# Altium PCB LNA_Testboard.PcbDoc
Units mm, origin at the board's own origin, x right, y up, seen from the top; angles counter-clockwise.
Board outline 152.4 x 101.6 mm, 2 copper layers (Top Layer, Bottom Layer); 6 components, 3 nets, 15 pads, 4 vias.
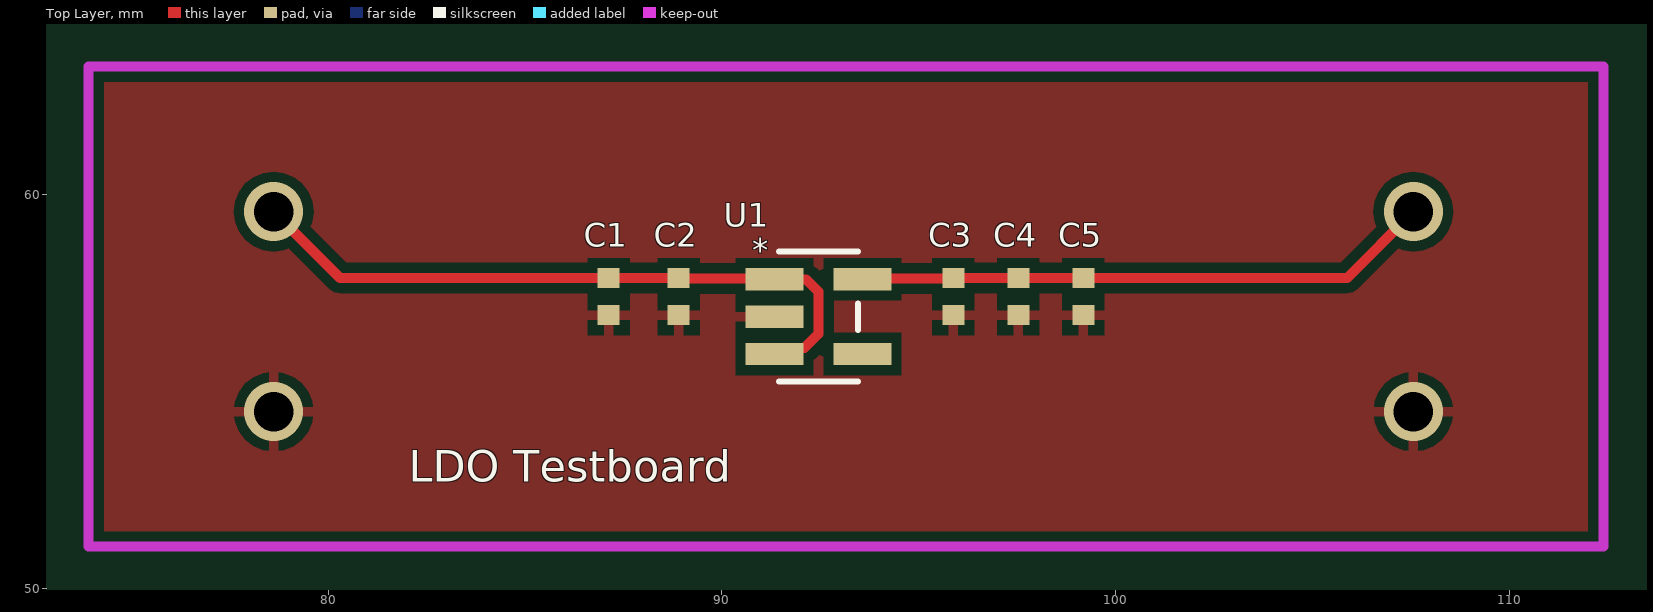
[diagram p0: Top Layer view]
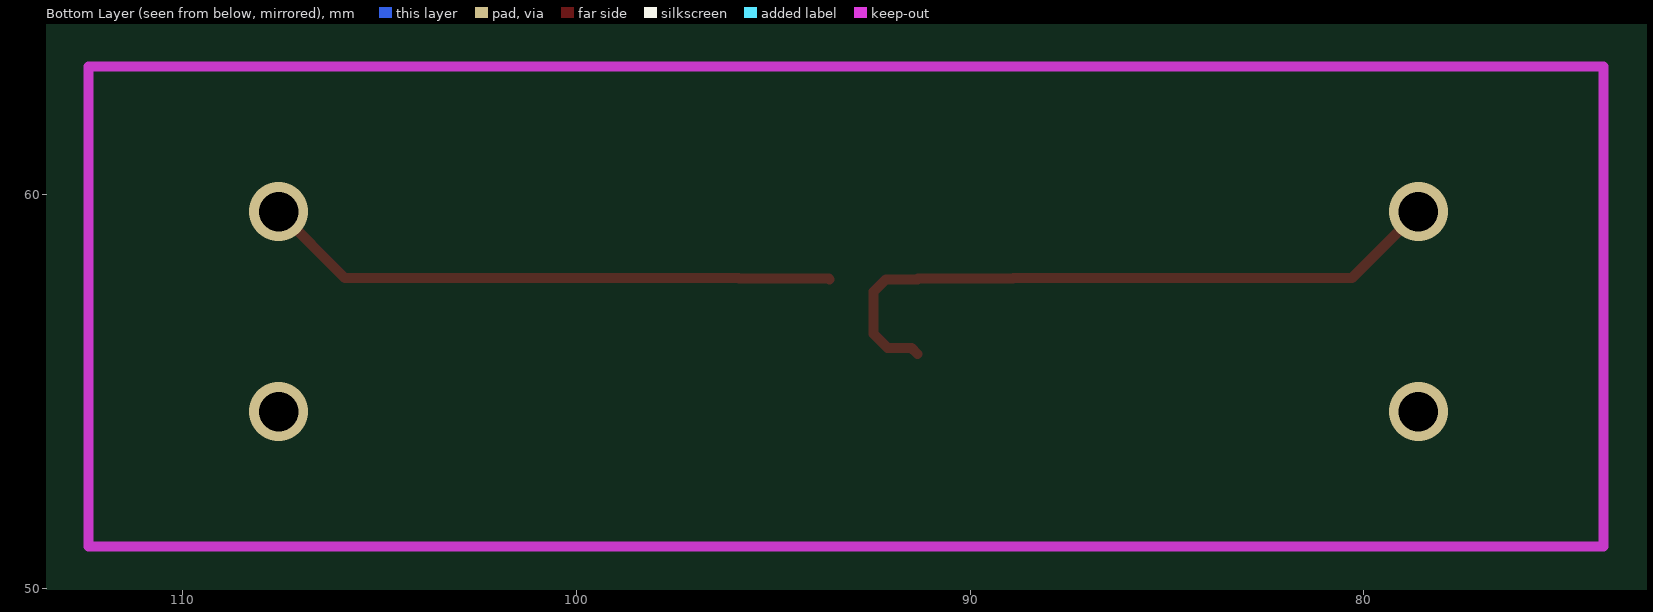
[diagram p1: Bottom Layer view, seen from below]

## Layer stack, top to bottom
Top Solder: solder mask 0.0102, Solder Resist, Dk 3.5
Top Layer: signal copper 0.0356
Dielectric 1: dielectric 0.32, FR-4, Dk 4.8
Bottom Layer: signal copper 0.0356
Bottom Solder: solder mask 0.0102, Solder Resist, Dk 3.5

## Board outline
25.4,25.4 177.8,25.4 177.8,127 25.4,127

## Design rules (kind name [scope] priority, off if disabled: settings)
Clearance [All] p1: gap=0.254 ignorepadtopadclearanceinfootprint=FALSE except(0: Arc-Hole Track-Hole SMDPad-Hole THPad-Hole Via-Hole Fill-Hole Poly-Hole Region-Hole Text-Hole)
PolygonConnect [All] p1: connectstyle=Relief reliefconductorwidth=0.254 reliefentries=4 polygonreliefangle="90 Angle" airgapwidth=0.254
RoomDefinition LNA_Testboard [InComponentClass('LNA_Testboard')] p1: confinementstyle=ConfineIn formatcopy=TRUE lockcomponents=FALSE outline 73.914,63.246 112.395,63.246 112.395,51.054 73.914,51.054
RoutingVias [All] p1: holewidth=0.711 width=1.27 viastyle="Through Hole" minholewidth=0.711 minwidth=1.27 maxholewidth=0.711 maxwidth=1.27
SolderMaskExpansion [All] p1: expansion=0.102
Width [All] p1: maxlimit=0.254 minlimit=0.254 preferedwidth=0.254
30 further rules are at their usual default settings.

## Components (designator, comment, footprint, x,y, rotation, side; value= is the part's Value field where it differs from the comment)
C1 "" YAG_CC0402 87.122,57.404 r270 top value=Value
C2 "" YAG_CC0402 88.9,57.404 r270 top value=Value
C3 "" YAG_CC0402 95.885,57.404 r270 top value=Value
C4 "" YAG_CC0402 97.536,57.404 r270 top value=Value
C5 "" YAG_CC0402 99.187,57.404 r270 top value=Value
U1 "" DBV5 92.456,56.896 r0 top value=Value

## Footprints (in the part's own frame and the unit in brackets; to place one, negate y for a bottom-side part, rotate by r counter-clockwise, add the part's x,y. Pads: shape width x height; smd on the part's side, far side on the other; paste and mask are expansions set on the pad)
DBV5 [mil]
  rect 57.56x22.36 smd paste+0 mask+0: 1(-44,37.4) 2(-44,0) 3(-44,-37.4) 4(44,-37.4) 5(44,37.4)
  silkscreen extent -40,-65 40,65, body extent 0,0 10,10, height 10
YAG_CC0402 [mil]
  rect 20x22 smd paste+0 mask+0: 1(-18.5,0) 2(18.5,0)
  body extent 0,0 10,10, height 10

## Part data
C1 C2 C3 C4 C5: library part C0201C270J3GACTU, "No Description Available", Built_By=EMA_UL_Team, Copyright="Copyright (C) 2018 Accelerated Designs. All rights reserved", Manufacturer_Part_Number=C0201C270J3GACTU, RefDes=RefDes, Type=DEV, Vendor=Kemet
U1: library part LP5907MFX-3.3/NO, "No Description Available", Manufacturer_Part_Number=LP5907MFX-3.3/NOPB, Built_By=EMA_UL_Team, Copyright="Copyright (C) 2018 Accelerated Designs. All rights reserved", RefDes=RefDes, Type=DEV, Vendor="Texas Instruments"

## Via types
v1: diameter 1.5, hole 1, Top Layer to Bottom Layer, 4 vias

## Nets (pads, with @x,y where several pads share a name; then routed paths per layer and width w, separated by ;. In a path a pad name is that pad's centre, name@x,y a point inside that pad or via, vN(x,y) a via of type N, cw(c..) or ccw(c..) an arc to the next point about the centre after c; other vN are vias at no path point)
GND: C1.2 C2.2 C3.2 C4.2 C5.2 U1.2
  other v1: 78.613,54.483 107.569,54.483
V_IN: C1.1 C2.1 U1.1 U1.3 | length 17.1
  Top Layer w0.254: v1(78.613,59.563) 80.302,57.874 C1.1 C2.1 88.914,57.86 91.324,57.86 U1.1 92.141,57.846 92.45,57.537 92.45,56.454 92.099,56.103 91.495,56.103 U1.3
V_OUT: C3.1 C4.1 C5.1 U1.5 | length 14.7
  Top Layer w0.254: U1.5 93.588,57.86 95.871,57.86 C3.1 C4.1 C5.1 105.88,57.874 v1(107.569,59.563)
pads on no net: U1.4

## Polygon pours and split planes (outlines as drawn)
GND on Top Layer "Top Layer-GND" (solid, pour order 0): 73.914,63.246 73.914,51.054 112.395,51.054 112.395,63.246

## Keep-outs
Keep-Out Layer:
  lines w0.254: 73.914,51.054 112.395,51.054 112.395,63.246 73.914,63.246 73.914,51.054

## Silkscreen, mask and mechanical layers (free items; w line width, h text height)
Top Overlay:
  text "LDO Testboard" at 82.042,52.705 h0.8
Bottom Solder:
  text "MICHKO09" at 104.521,52.451 h1.52

## Text inside footprints (layer, text, board x,y; h text height)
U1: Top Overlay "*" at 90.767,58.287 h0.6; Mechanical 13 "*" at 91.516,57.322 h0.6